# Altium PCB Audio_testboard.PcbDoc (part 4 of 6)
Units mm, origin at the board's own origin, x right, y up, seen from the top; angles counter-clockwise.
Board outline 220.73 x 144.32 mm, 4 copper layers (Top Layer, Mid-Layer 1, Mid-Layer 2, Bottom Layer), stack 1.894 mm thick; 462 components, 310 nets, 1757 pads, 740 vias.
Unrouted connection lines stored in the file: 5.
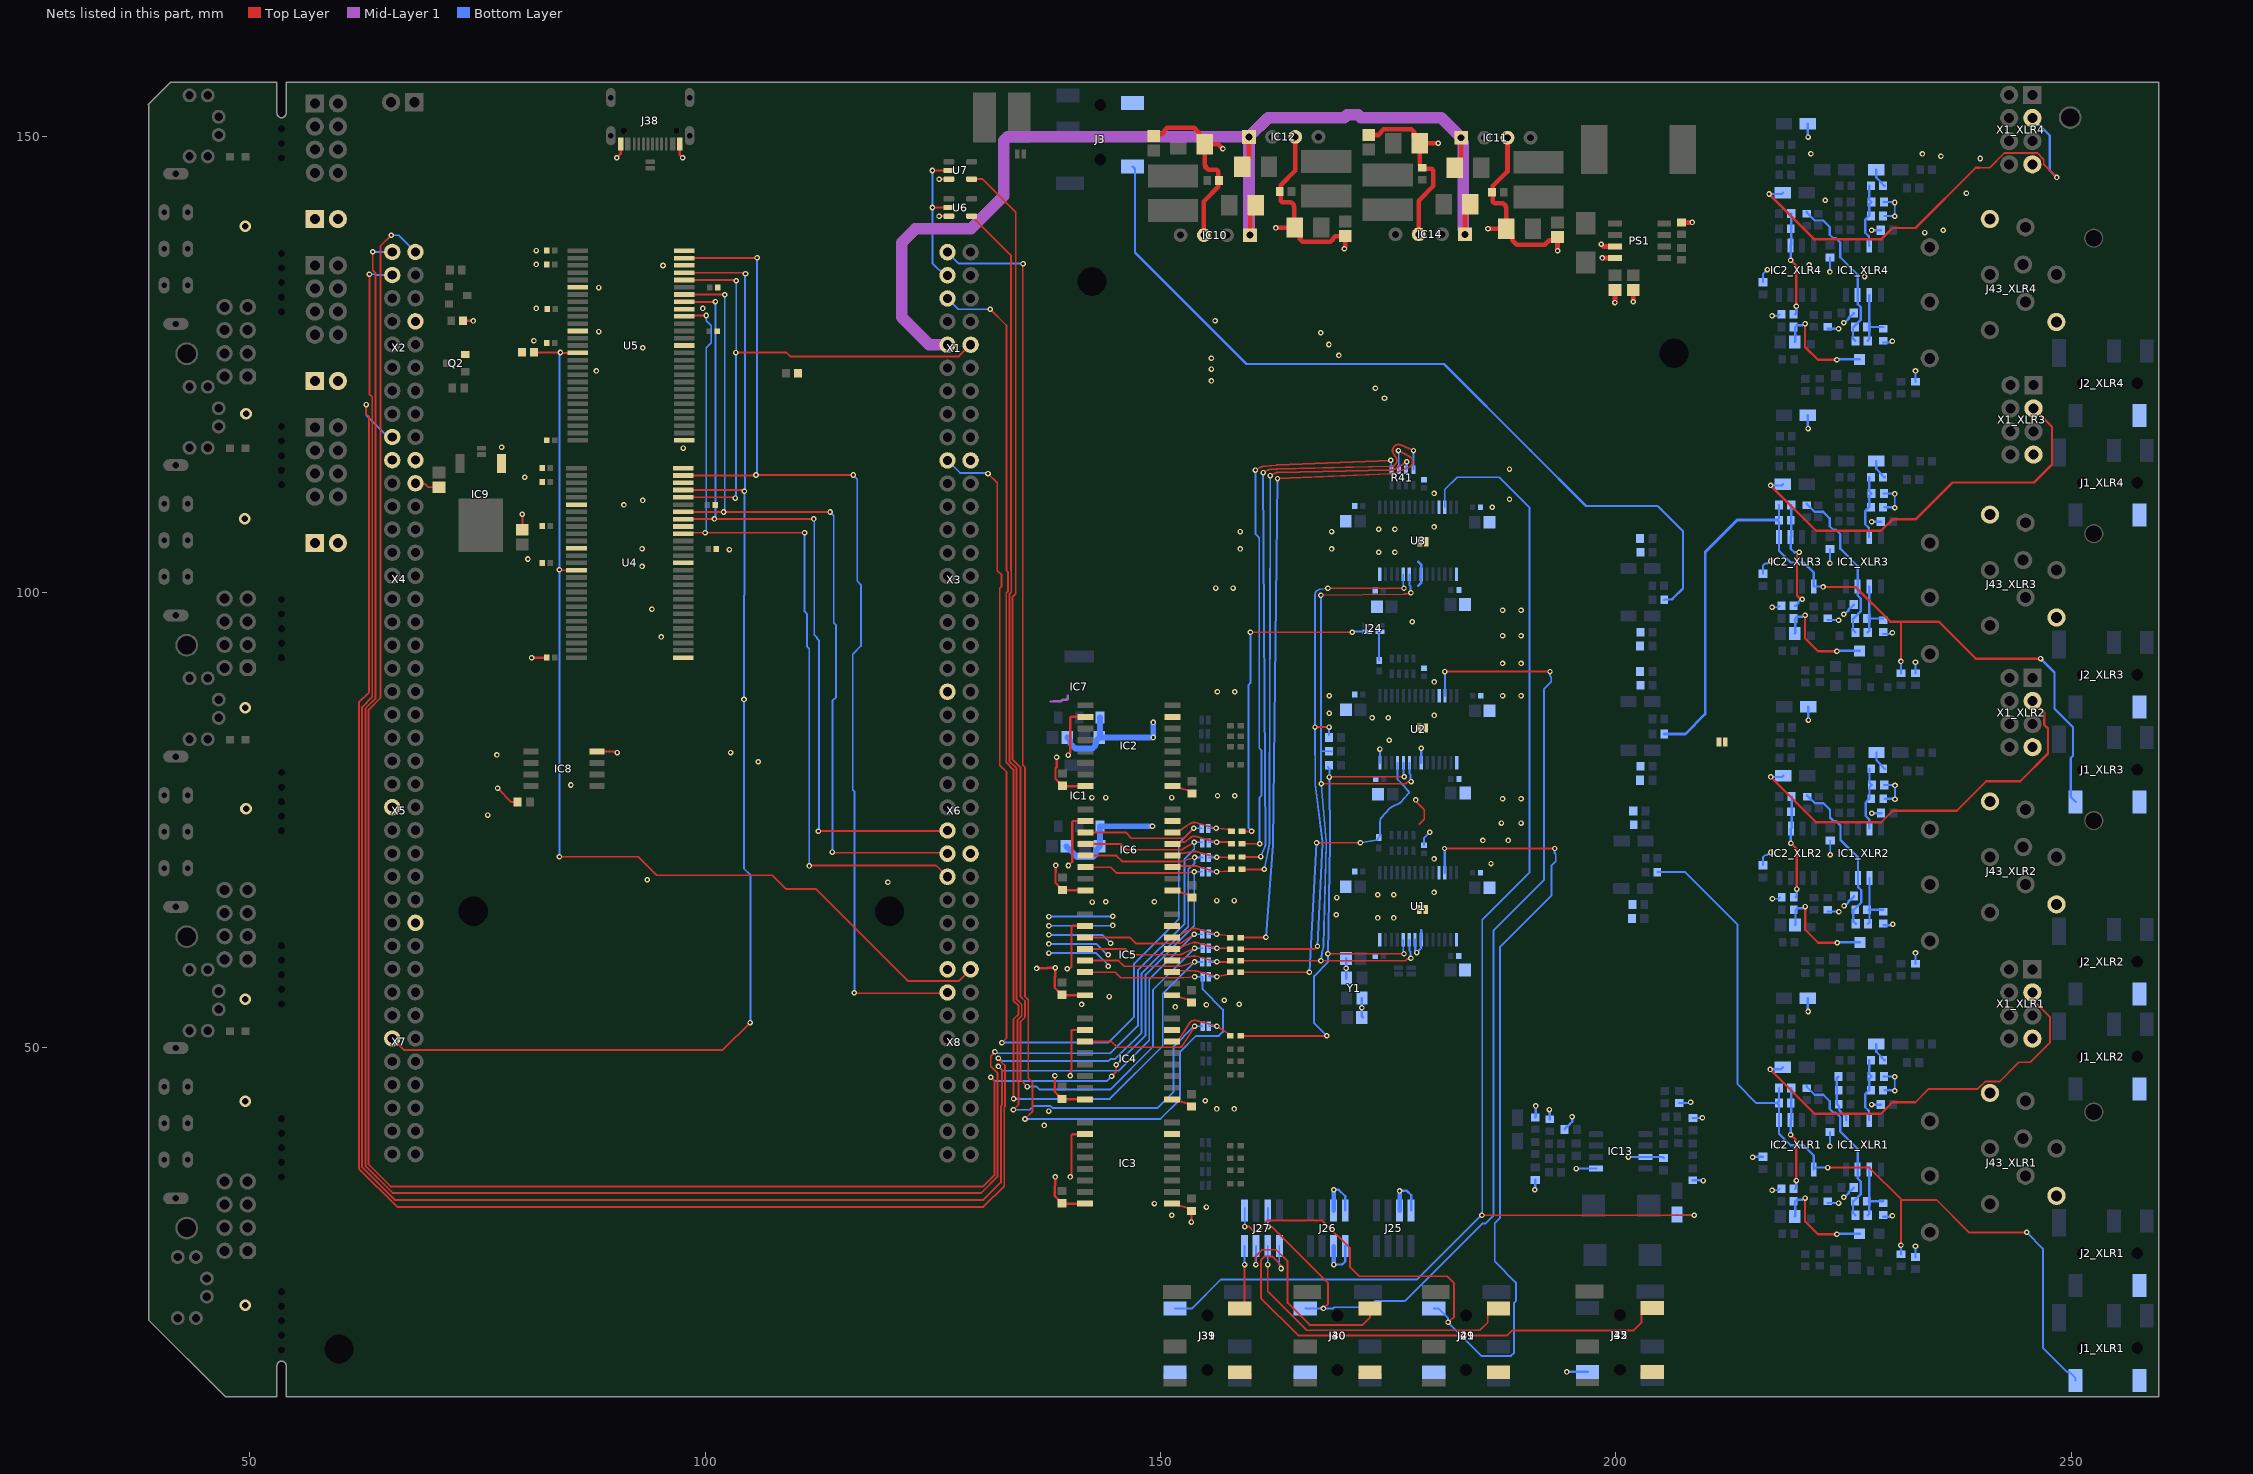
[diagram p5: the nets of this part, all layers, seen from the top]

## Via types
v1: diameter 0.61, hole 0.305, Top Layer to Bottom Layer, 321 vias
v2: diameter 0.6, hole 0.3, Top Layer to Bottom Layer, tented both sides, 219 vias
v3: diameter 0.61, hole 0.305, Top Layer to Bottom Layer, tented both sides, 190 vias
v4: diameter 1.27, hole 0.711, Top Layer to Bottom Layer, 8 vias
v5: diameter 0.6, hole 0.3, Top Layer to Bottom Layer, 2 vias

## Nets (pads, with @x,y where several pads share a name; then routed paths per layer and width w, separated by ;. In a path a pad name is that pad's centre, name@x,y a point inside that pad or via, vN(x,y) a via of type N, cw(c..) or ccw(c..) an arc to the next point about the centre after c; other vN are vias at no path point) (continued)
D10: U4.45 U5.45 X6.15 | length 92.2
  Top Layer w0.203: U4.45@97.601,106.421 97.703,106.523 v3(100.006,106.523) v3(110.928,106.523) ; U5.45@97.822,130.385 v3(100.125,130.385) ; v3(111.436,69.947) 111.487,69.998 125.378,69.998 X6.15@126.62,68.756
  Bottom Layer w0.203: 100.125,106.845 100.125,126.844 100.684,127.403 100.684,129.236 100.125,129.795 v3(100.125,130.385) ; v3(110.928,106.523) 110.928,97.887 111.182,97.633 111.182,94.057 111.436,93.803 v3(111.436,69.947)
D11: U4.47 U5.47 X6.11 | length 90.2
  Top Layer w0.203: U4.47@97.601,108.021 100.996,108.021 v3(101.022,108.047) v3(111.944,108.047) ; U5.47@97.72,131.883 101.115,131.883 v3(101.141,131.909) ; v3(112.452,73.757) 112.491,73.796 126.581,73.796 X6.11@126.62,73.836
  Bottom Layer w0.203: v3@101.141,108.276 v3(101.141,131.909) ; v3(111.944,108.047) 111.995,107.996 111.995,95.332 112.273,95.054 112.273,94.963 112.503,94.733 112.503,73.808 v3(112.452,73.757)
D12: U4.48 U5.48 X6.13 | length 94.9
  Top Layer w0.203: U4.48@97.601,108.821 102.026,108.821 v3(102.038,108.809) v3(113.722,108.809) ; U5.48@97.72,132.683 102.145,132.683 v3(102.157,132.671) ; v3(113.976,71.471) 114.054,71.393 126.523,71.393 X6.13@126.62,71.296
  Bottom Layer w0.203: v3@102.038,108.919 102.157,109.038 v3(102.157,132.671) ; v3(113.722,108.809) 114.128,108.403 114.128,96.637 114.382,96.383 114.382,88.47 113.976,88.064 v3(113.976,71.471)
D13: U4.50 U5.50 X1.10 | length 61.9
  Top Layer w0.203: U4.50@97.601,110.421 103.22,110.421 v3(103.308,110.333) ; U5.50@97.72,134.283 103.339,134.283 v3(103.427,134.195) ; v3(103.381,126.314) 108.94,126.314 109.362,125.891 127.876,125.891 X1.10@129.16,127.176
  Bottom Layer w0.203: v3(103.308,110.333) 103.381,110.406 v3(103.381,126.314) 103.427,126.36 v3(103.427,134.195)
D14: U4.51 U5.51 X7.9 | length 137.2
  Top Layer w0.203: X7.9@65.66,51.001 66.916,49.745 101.948,49.745 104.94,52.737 v3(104.94,52.751) ; U4.51@97.601,111.221 104.198,111.221 v3(104.324,111.095) ; U5.51@97.72,135.083 104.317,135.083 v3(104.443,134.957)
  Bottom Layer w0.203: v3(104.443,134.957) 104.383,134.897 104.383,111.154 v3(104.324,111.095) 104.324,99.69 104.273,99.64 104.273,69.657 104.974,68.956 104.974,52.786 v3(104.94,52.751)
  other v3: 104.273,88.235
D15: U4.53 U5.53 X8.5 | length 118.7
  Top Layer w0.203: U4.53@97.601,112.821 105.542,112.821 v3(105.594,112.873) v3(116.262,112.873) ; U5.53@97.72,136.683 105.661,136.683 v3(105.713,136.735) ; v3(116.391,56.014) 116.428,55.977 126.541,55.977 X8.5@126.62,56.056
  Bottom Layer w0.203: v3@105.594,112.763 105.594,112.983 105.713,113.102 v3(105.713,136.735) ; v3(116.262,112.873) 116.709,112.426 116.709,101.235 117.116,100.828 117.116,94.098 116.211,93.194 116.211,78.309 116.414,78.106 116.414,56.038 v3(116.391,56.014)
Fout_1: J27.7 J39.2 | length 7.1
  Top Layer w0.203: J39.2@158.704,21.364 159.241,21.901 v1(159.241,26.179)
  Bottom Layer w0.203: v1(159.241,26.179) J27.7@159.241,28.212
Fout_2: J27.5 J40.2 | length 23.3
  Top Layer w0.203: v1(160.477,26.179) 160.401,26.255 160.401,27.051 161.163,27.813 162.687,27.813 163.957,26.543 163.957,21.971 166.37,19.558 172.212,19.558 173.004,20.35 J40.2@173.004,21.364
  Bottom Layer w0.203: v1(160.477,26.179) 160.477,28.178 J27.5@160.511,28.212
Fout_3: J27.3 J41.2 | length 33.6
  Top Layer w0.203: v1(161.781,26.179) 161.781,23.258 166.076,18.963 185.079,18.963 185.936,19.82 185.936,20.704 186.596,21.364 J41.2@187.104,21.364
  Bottom Layer w0.203: v1(161.781,26.179) J27.3@161.781,28.212
Fout_4: J27.1 J45.2 | length 55.9
  Top Layer w0.203: v1@163.161,25.828 163.171,25.838 163.171,26.157 163.051,26.277 163.051,26.315 162.289,27.077 161.443,27.077 161.036,26.67 161.036,22.479 165.116,18.399 188.071,18.399 188.595,18.923 201.93,18.923 202.832,19.825 202.832,20.74 203.492,21.4 J45.2@204,21.4
  Bottom Layer w0.203: J27.1@163.051,28.212 163.051,26.179 163.161,26.069
  other v1: 163.239,25.75
GND: C1.1 C2.1 C7.1 C8.1 C9.1 C10.1 C11.2 C12.2 C23.1 C25.1 C26.1 C31.2 C32.2 C33.2 C35.1 C37.1 C39.1 C42.1 C43.1 C44.2 C52.2 C54.1 C72.2 C73.1 C75.2 C76.1 C78.2 C79.1 C91.2 C92.1 C93.1 C94.1 IC1.1 IC2.9 IC2.15 IC3.9 IC3.15 IC4.9 IC4.15 IC5.9 IC5.15 IC6.9 IC6.15 IC7.1 IC10.3 IC11.3 IC12.3 IC14.3 J25.2 J25.4 J26.1 J26.2 J26.3 J26.4 J33.1 J34.1 J35.1 PS1.7 PS1.8 R46.1 R47.1 R60.1 R61.1 R62.1 U1.21 U1.22 U1.28 U2.21 U2.28 U3.21 U3.28 Y1.2 Y1.4 | length 167.8
  Top Layer w0.203: v2(178.037,77.197) 178.037,77.09 178.179,76.948 178.179,76.89 178.956,76.113 178.956,75.068 178.418,74.53
  Top Layer w0.254: IC3.9@151.265,32.874 152.013,32.676 153.026,32.395 C39.1@153.399,32.072 v2(153.399,30.842) ; IC4.9@151.265,44.324 152.013,44.126 153.026,43.845 C37.1@153.399,43.522 ; IC5.9@151.265,55.754 152.013,55.556 153.026,55.275 C35.1@153.399,54.952 ; IC6.9@151.336,67.272 152.084,67.074 153.097,66.793 C26.1@153.47,66.47 ; IC2.9@151.336,78.702 152.084,78.504 153.097,78.223 C54.1@153.47,77.9
  Top Layer w0.508: C73.1@149.26,150.1 149.454,150.294 150.173,150.294 150.43,150.551 150.43,150.647 150.762,150.98 153.702,150.98 154.234,150.447 154.234,149.846 C72.2@154.88,149.2 ; IC10.3@154.76,139.2 154.76,142.9 156.36,144.5 156.36,146.207 156.167,146.4 155.26,146.4 155.16,146.5 155.11,146.5 154.939,146.671 154.939,146.805 154.88,146.864 C72.2@154.88,149.2 ; v1(156.859,148.688) 156.347,149.2 C72.2@154.88,149.2 ; v1(162.66,140) C78.2@164.68,140 ; IC12.3@164.8,150 164.8,146.3 163.2,144.7 163.2,142.993 163.393,142.8 164.3,142.8 164.4,142.7 164.45,142.7 164.621,142.529 164.621,142.395 164.68,142.336 C78.2@164.68,140 ; v1(170.2,137.7) 170.2,137.727 170.3,137.827 C79.1@170.3,139.1 169.194,139.1 168.906,138.813 168.906,138.717 168.668,138.479 165.6,138.479 165.326,138.753 165.326,139.354 C78.2@164.68,140 ; C92.1@172.86,150.2 173.966,150.2 174.254,150.487 174.254,150.583 174.492,150.821 177.56,150.821 177.834,150.547 177.834,149.946 C91.2@178.48,149.3 ; IC14.3@178.36,139.3 178.36,143 179.96,144.6 179.96,146.307 179.767,146.5 178.86,146.5 R46.1@178.76,146.6 178.71,146.6 178.539,146.771 178.539,146.905 178.48,146.964 C91.2@178.48,149.3 ; v1(180.5,149.3) C91.2@178.48,149.3 ; v1(185.96,139.9) C75.2@187.98,139.9 ; IC11.3@188.1,149.9 188.1,146.2 186.5,144.6 186.5,142.893 186.693,142.7 187.6,142.7 187.7,142.6 187.75,142.6 187.921,142.429 187.921,142.295 187.98,142.236 C75.2@187.98,139.9 ; v1(193.6,137.5) C76.1@193.6,139 193.24,138.64 192.696,138.64 192.208,138.152 189.126,138.152 188.626,138.653 188.626,139.254 C75.2@187.98,139.9 ; v1(198.4,138.2) 198.409,138.2 198.644,137.965 PS1.7@199.888,137.965 ; v1(198.5,136.7) 198.505,136.695 PS1.8@199.888,136.695 ; v1(199.9,131.8) C93.1@199.9,133.2 ; v1(201.9,131.9) C94.1@201.9,133.2 ; R47.1@207.2,140.6 v1(208.4,140.6)
  Bottom Layer w0.254: v1(169.02,26.179) 169.943,26.179 170.29,26.526 J26.1@170.29,28.212 ; v1(169.02,34.4) 169.562,34.4 170.29,33.672 J26.2@170.29,32.112 ; C33.2@170.379,59.798 170.383,59.794 v5(170.383,58.714) 170.383,57.587 Y1.2@170.417,57.553 ; Y1.4@172.117,55.439 v5(172.117,54.386) 172.117,53.437 C32.2@172.233,53.321 ; U2.28@174.1,81.261 v2(174.1,82.785) ; v1(176.259,34.273) 177.055,34.273 177.529,33.799 J25.2@177.529,32.112 ; U1.22@177.961,61.83 177.961,60.704 178.139,60.527 v2(178.139,60.433) 178.606,60.9 178.606,61.815 U1.21@178.621,61.83 178.621,62.897 ; 178.284,103.377 178.618,103.043 178.618,101.965 U3.21@178.621,101.962 178.618,101.959 178.618,101.019 178.291,100.692 ; v2(178.635,82.875) 178.647,82.864 U2.21@178.647,81.261
  Bottom Layer w0.508: v1(169.02,26.179) J26.3@169.02,28.212 ; J26.4@169.02,32.112 v1(169.02,34.4) ; J25.4@176.259,32.112 v1(176.259,34.273)
  Bottom Layer w0.635: C2.1@139.683,72.117 139.683,72.067 140.016,71.734 140.066,71.734 140.544,71.256 140.544,71.201 140.849,70.896 142.581,70.896 142.886,71.201 142.886,71.638 143.315,72.067 C1.1@143.315,72.117 143.37,72.172 IC1.1@143.37,74.307 v1(149.112,74.307) ; C23.1@139.759,84.055 140.092,83.722 140.092,83.393 140.65,82.834 142.543,82.834 142.848,83.139 142.848,83.301 142.944,83.397 142.944,83.722 C25.1@143.277,84.055 ; IC7.1@143.37,86.245 143.37,84.148 C25.1@143.277,84.055 ; v1(149.208,85.708) v1(149.208,84.055) C25.1@143.277,84.055
  other v2: 151.24,31.604 155.05,32.493 149.335,32.874 156.193,43.268 158.098,43.268 154.923,44.177 151.621,54.464 155.05,54.718 158.66,54.769 157.001,55.209 173.846,64.243 175.624,64.243 169.29,64.589 142.511,65.986 144.001,66.021 149.335,66.021 156.193,66.148 158.098,66.148 169.362,66.475 173.846,66.783 175.624,66.783 142.477,77.451 144.001,77.451 151.24,77.451 156.264,77.666 158.169,77.666 175.108,83.759 173.236,86.214 175.014,86.214 168.532,86.722 168.532,88.627 156.253,89.085 158.158,89.085 177.656,96.755 156.066,100.458 157.971,100.458 173.965,104.375 175.743,104.375 158.753,104.756 168.786,104.756 158.753,106.661 168.786,106.661 173.965,106.915 175.743,106.915
GND_A: C3.1 C4.1 C5.1 C5_XLR1.1 C5_XLR2.1 C5_XLR3.1 C5_XLR4.1 C6.1 C8_XLR1.2 C8_XLR2.2 C8_XLR3.2 C8_XLR4.2 C9_XLR1.2 C9_XLR2.2 C9_XLR3.2 C9_XLR4.2 C10_XLR1.1 C10_XLR2.1 C10_XLR3.1 C10_XLR4.1 C11_XLR1.1 C11_XLR2.1 C11_XLR3.1 C11_XLR4.1 C12_XLR1.2 C12_XLR2.2 C12_XLR3.2 C12_XLR4.2 C13_XLR1.1 C13_XLR2.1 C13_XLR3.1 C13_XLR4.1 C15.1 C16.1 C17.1 C18.1 C21.1 C22.1 C27.2 C28.2 C29.2 C30.2 C40.1 C41.1 C46.1 C47.1 C49.1 C50.2 C51.2 C84.1 C88.1 C89.2 C90.1 D2_XLR1.2 D2_XLR2.2 D2_XLR3.2 D2_XLR4.2 IC13.3 IC13.5 J1_XLR1.3 J1_XLR2.3 J1_XLR3.3 J1_XLR4.3 J2_XLR1.3 J2_XLR2.3 J2_XLR3.3 J2_XLR4.3 J3.3 J29.3 J30.3 J31.3 J32.3 J33.2 J34.2 J35.2 J36.1 J36.2 J39.3 J40.3 J41.3 J43_XLR1.1 J43_XLR1.4 J43_XLR2.1 J43_XLR2.4 J43_XLR3.1 J43_XLR3.4 J43_XLR4.1 J43_XLR4.4 J45.3 R3.1 R4.1 R7.1 R8.1 R9_XLR1.1 R9_XLR2.1 R9_XLR3.1 R9_XLR4.1 R10_XLR1.1 R10_XLR2.1 R10_XLR3.1 R10_XLR4.1 R11_XLR1.1 R11_XLR2.1 R11_XLR3.1 R11_XLR4.1 R19_XLR1.2 R19_XLR2.2 R19_XLR3.2 R19_XLR4.2 R20_XLR1.1 R20_XLR2.1 R20_XLR3.1 R20_XLR4.1 R38.1 R40.1 R52.2 R53.1 R58.2 R59.1 R66_XLR1.1 R66_XLR2.1 R66_XLR3.1 R66_XLR4.1 U1.11 U1.15 U2.11 U2.15 U3.11 U3.15 X1_XLR1.7 X1_XLR2.7 X1_XLR3.7 X1_XLR4.7 | length 129.3
  Top Layer w0.254: v1(220.774,33.48) 220.774,30.939 222.193,29.52 v1(224.266,29.52) ; v1(220.774,97.48) 220.774,94.939 222.193,93.52 v1(224.266,93.52) ; v1(220.774,129.48) 220.774,126.939 222.193,125.52 v1(224.266,125.52) ; v1(220.806,65.48) 220.806,62.939 222.225,61.52 v1(224.298,61.52)
  Bottom Layer w0.203: C15.1@178.926,72.235 178.926,73.006 v2(179.561,73.641) ; C9_XLR3.2@216.138,102.027 216.138,102.918 216.356,103.136 216.601,103.136 216.891,103.426 v1(217.001,103.426) ; C9_XLR4.2@216.138,134.027 216.138,134.918 v1(216.646,135.426) ; C9_XLR2.2@216.17,70.027 216.17,70.918 216.372,71.12 216.585,71.12 216.891,71.426 v1(217.001,71.426) ; v1(217.154,34.346) 217.822,34.346 R10_XLR1.1@217.994,34.518 ; v1(217.154,98.346) 217.822,98.346 R10_XLR3.1@217.994,98.518 ; v1(217.154,130.346) 217.822,130.346 R10_XLR4.1@217.994,130.518 ; v1(217.186,66.346) 217.854,66.346 R10_XLR2.1@218.026,66.518 ; v1(223.504,39.172) C11_XLR1.1@223.504,40.741 ; v1(223.504,103.172) C11_XLR3.1@223.504,104.741 ; v1(223.504,135.172) C11_XLR4.1@223.504,136.741 ; v1(223.536,71.172) C11_XLR2.1@223.536,72.741 ; v1(230.616,45.268) v1(230.616,46.792) ; v1(230.616,109.268) v1(230.616,110.792) ; v1(230.616,141.268) v1(230.616,142.792) ; v1(230.648,77.268) v1(230.648,78.792)
  Bottom Layer w0.254: v1(191.1,34.4) 191.15,34.45 C88.1@191.15,35.477 ; R58.2@191.15,42.327 191.2,42.377 v1(191.2,43.6) ; v1(192.7,43.2) 192.75,43.15 R59.1@192.75,42.127 ; C89.2@194.375,41.027 194.375,41.077 194.698,41.4 194.748,41.4 195.2,41.852 v1(195.2,42.4) ; v1(194.6,14.4) J32.3@196.9,14.4 ; v1(195.655,36.722) IC13.5@197.838,36.722 ; v1(201.385,37.992) IC13.3@203.262,37.992 205.135,37.992 C90.1@205.25,37.877 ; R53.1@206.95,43.927 208.127,43.927 v1(208.2,44) ; R52.2@208.45,35.427 209.573,35.427 v1(209.6,35.4) ; C84.1@208.45,42.277 209.477,42.277 v1(209.5,42.3) ; v1(215.011,37.973) 215.065,38.027 C9_XLR1.2@216.138,38.027 ; C13_XLR1.1@219.643,31.47 219.694,31.521 219.694,33.121 219.875,33.302 220.499,33.302 220.678,33.48 v1(220.774,33.48) ; C13_XLR3.1@219.643,95.47 219.694,95.521 219.694,97.121 219.875,97.302 220.499,97.302 220.678,97.48 v1(220.774,97.48) ; C13_XLR4.1@219.643,127.47 219.694,127.521 219.694,129.121 219.875,129.302 220.499,129.302 220.678,129.48 v1(220.774,129.48) ; C13_XLR2.1@219.675,63.47 219.726,63.521 219.726,65.121 219.907,65.302 220.531,65.302 220.71,65.48 v1(220.806,65.48) ; C12_XLR1.2@221.082,55.428 221.082,53.994 v1(221.11,53.966) ; C12_XLR3.2@221.082,119.428 221.082,117.994 v1(221.11,117.966) ; C12_XLR4.2@221.082,151.428 221.082,149.994 v1(221.11,149.966) ; C12_XLR2.2@221.114,87.428 221.114,85.994 v1(221.142,85.966) ; R19_XLR1.2@223.25,32.945 224.437,32.945 v1(224.457,32.926) ; R19_XLR3.2@223.25,96.945 224.437,96.945 v1(224.457,96.926) ; R19_XLR4.2@223.25,128.945 224.437,128.945 v1(224.457,128.926) ; R19_XLR2.2@223.282,64.945 224.469,64.945 v1(224.489,64.926) ; v1(224.266,29.52) 224.311,29.565 D2_XLR1.2@226.772,29.565 ; v1(224.266,93.52) 224.311,93.565 D2_XLR3.2@226.772,93.565 ; v1(224.266,125.52) 224.311,125.565 D2_XLR4.2@226.772,125.565 ; v1(224.298,61.52) 224.343,61.565 D2_XLR2.2@226.804,61.565 ; v1(225.028,33.584) 225.096,33.652 225.198,33.652 225.554,34.008 225.554,34.11 225.716,34.272 225.801,34.272 226.124,34.595 C8_XLR1.2@226.124,34.645 ; v1(225.028,97.584) 225.096,97.652 225.198,97.652 225.554,98.008 225.554,98.11 225.716,98.272 225.801,98.272 226.124,98.595 C8_XLR3.2@226.124,98.645 ; v1(225.028,129.584) 225.096,129.652 225.198,129.652 225.554,130.008 225.554,130.11 225.716,130.272 225.801,130.272 226.124,130.595 C8_XLR4.2@226.124,130.645 ; v1(225.06,65.584) 225.128,65.652 225.23,65.652 225.586,66.008 225.586,66.11 225.748,66.272 225.833,66.272 226.156,66.595 C8_XLR2.2@226.156,66.645 ; v1(228.076,43.744) C10_XLR1.1@229.092,43.744 ; v1(228.076,107.744) C10_XLR3.1@229.092,107.744 ; v1(228.076,139.744) C10_XLR4.1@229.092,139.744 ; v1(228.108,75.744) C10_XLR2.1@229.124,75.744 ; R9_XLR1.1@229.346,31.421 230.135,31.421 230.266,31.552 v1(230.362,31.552) ; R9_XLR3.1@229.346,95.421 230.135,95.421 230.266,95.552 v1(230.362,95.552) ; R9_XLR4.1@229.346,127.421 230.135,127.421 230.266,127.552 v1(230.362,127.552) ; R9_XLR2.1@229.378,63.421 230.167,63.421 230.298,63.552 v1(230.394,63.552) ; C5_XLR1.1@229.426,46.837 230.571,46.837 v1(230.616,46.792) ; C5_XLR3.1@229.426,110.837 230.571,110.837 v1(230.616,110.792) ; C5_XLR4.1@229.426,142.837 230.571,142.837 v1(230.616,142.792) ; C5_XLR2.1@229.458,78.837 230.603,78.837 v1(230.648,78.792) ; R11_XLR1.1@229.522,45.313 230.571,45.313 v1(230.616,45.268) ; R11_XLR3.1@229.522,109.313 230.571,109.313 v1(230.616,109.268) ; R11_XLR4.1@229.522,141.313 230.571,141.313 v1(230.616,141.268) ; R11_XLR2.1@229.554,77.313 230.603,77.313 v1(230.648,77.268) ; R66_XLR1.1@232.9,27 v1(232.9,28.2) ; R66_XLR2.1@232.9,59.2 v1(232.9,60.4) ; R66_XLR3.1@232.9,91.1 v1(232.9,92.3) ; R66_XLR4.1@232.9,123.1 v1(232.9,124.3)
  other v1: 174.6,121.3 173.6,122.4 155.6,123.2 155.6,124.5 155.6,125.7 169.6,126 168.5,127.2 167.6,128.5 156,129.8 227.314,134.664 221.218,135.934 233.918,139.49 235.95,139.744 222.996,143.046 238.49,143.808 240.014,147.618 235.696,147.872 233.664,148.126 221.412,148.153
  other v2: 180.044,67.037 186.292,70.212 180.044,70.72 185.403,72.752 188.197,72.752 187.435,74.657 189.59,74.657 187.562,77.324 189.59,77.324 180.069,86.468 187.562,88.627 189.59,88.627 180.069,90.151 187.562,92.183 189.59,92.183 187.562,95.231 189.59,95.231 187.562,98.025 189.59,98.025 180.044,107.169 186.419,109.328 188.324,110.217 180.044,110.852 188.324,113.519
  other v4: 49.5,21.704 49.5,44.104 49.5,55.304 49.6,76.204 49.5,87.304 49.473,108.077 49.6,119.604 49.5,140.204
GND_MCU: C24.1 C34.1 C36.1 C38.1 C53.1 C55.2 C56.2 C57.2 C58.2 C59.2 C60.2 C61.2 C62.2 C63.2 C64.2 C65.2 C66.2 C67.2 C68.2 C69.1 C70.1 C71.1 C74.2 C77.2 C80.2 C95.2 IC2.2 IC2.8 IC3.2 IC3.8 IC4.2 IC4.8 IC5.2 IC5.8 IC6.2 IC6.8 IC8.4 IC9.1 IC10.1 IC11.1 IC12.1 IC14.1 J38.A1B12 J38.B1A12 Q2.2 R43.1 R44.1 R109.2 U4.6 U4.12 U4.28 U4.41 U4.46 U4.52 U4.54 U5.6 U5.12 U5.28 U5.41 U5.46 U5.52 U5.54 U6.3 U7.3 X1.9 X1.20 X2.8 X2.19 X2.20 X3.19 X4.2 X5.9 X5.20 X6.14 X8.3 X9.1 X9.2 X11.1 X11.2 X12.1 X12.2 | length 240.3
  Top Layer w0.203: X4.2@68.2,111.961 68.244,111.917 69.242,111.917 69.632,111.527 C71.1@70.796,111.527 ; v1(77.216,78.486) 78.74,76.962 C69.1@79.422,76.962 ; C70.1@79.94,106.853 v3(79.94,108.555) ; v1(125.699,141.29) U6.3@126.761,141.29 ; v1(125.699,145.354) U7.3@126.761,145.354
  Top Layer w0.254: R109.2@73.436,129.794 v1(74.549,129.794) ; v3(80.956,92.807) 80.97,92.821 C61.2@82.63,92.821 ; IC8.4@88.112,82.52 90.131,82.52 90.258,82.393 v3(90.354,82.393) ; v1(90.297,147.701) 90.73,148.134 J38.B1A12@90.73,149.21 ; J38.A1B12@97.23,149.21 97.23,148.007 v1(97.536,147.701) ; v1(136.4,58.7) 137.563,58.7 137.639,58.776 v1(138.451,58.776) 138.451,57.772 138.396,57.717 138.396,56.58 138.802,56.174 138.802,56.124 139.125,55.801 C34.1@139.175,55.801 139.222,55.754 IC5.8@141.715,55.754 ; v1(138.416,46.904) 138.429,46.891 138.429,46.32 138.396,46.287 138.396,45.15 138.802,44.744 138.802,44.694 139.125,44.371 C36.1@139.175,44.371 139.222,44.324 IC4.8@141.715,44.324 ; v1(138.46,35.799) 138.46,34.901 138.396,34.837 138.396,33.7 138.802,33.294 138.802,33.244 139.125,32.921 C38.1@139.175,32.921 139.222,32.874 IC3.8@141.715,32.874 ; v1(138.5,70) 138.5,69.268 138.467,69.235 138.467,68.098 138.873,67.692 138.873,67.642 139.196,67.319 C24.1@139.246,67.319 ; v1(138.598,81.876) 138.598,80.796 138.467,80.665 138.467,79.528 138.873,79.122 138.873,79.072 139.196,78.749 C53.1@139.246,78.749 139.293,78.702 IC2.8@141.786,78.702 ; C24.1@139.293,67.272 IC6.8@141.786,67.272 ; v1(139.774,58.666) 139.842,58.734 140.081,58.734 140.237,58.89 140.237,63.255 140.356,63.374 IC5.2@141.715,63.374 ; v1(139.871,82.114) 139.871,82.182 140.1,82.411 140.1,86.203 140.219,86.322 IC2.2@141.786,86.322 ; v1(139.895,69.995) 140.308,70.408 140.308,74.773 140.427,74.892 IC6.2@141.786,74.892 ; v1(140.094,35.799) 140.094,35.952 140.237,36.096 140.237,40.375 140.356,40.494 IC3.2@141.715,40.494 ; v1(140.094,46.904) 140.162,46.972 140.162,47.305 140.237,47.381 140.237,51.825 140.356,51.944 IC4.2@141.715,51.944
  Top Layer w0.508: C80.2@159,146.7 159,146.915 159.72,147.635 IC12.1@159.72,150 ; IC10.1@159.84,139.2 159.84,141.565 160.56,142.285 C74.2@160.56,142.5 ; C77.2@182.3,146.6 182.3,146.815 183.02,147.535 IC11.1@183.02,149.9 ; IC14.1@183.44,139.3 183.44,141.665 184.16,142.385 C95.2@184.16,142.6
  Mid-Layer 1 w0.254: 137.922,88.011 138.3,88.011 138.321,88.032 139.106,88.032 139.258,88.184 139.708,88.184 139.827,88.303 139.827,88.646
  Mid-Layer 1 w1.27: X1.9@126.62,127.176 124.624,127.176 121.6,130.2 121.6,138.4 123.1,139.9 129.2,139.9 132.8,143.5 132.8,149.583 133.217,150 IC12.1@159.72,150 ; IC10.1@159.84,139.2 159.72,139.32 IC12.1@159.72,150 ; IC14.1@183.44,139.3 183.313,139.427 183.313,139.796 183.265,139.844 183.265,149.356 183.147,149.474 183.147,149.773 180.82,152.1 172.019,152.1 171.689,152.43 170.511,152.43 170.181,152.1 161.82,152.1 IC12.1@159.72,150
  Bottom Layer w0.203: v2(137.757,60.386) 137.76,60.383 142.955,60.383 144.156,59.182 144.156,59.044 v1(144.272,58.928) ; v2@137.76,61.383 142.955,61.383 144.14,60.198 v1(144.272,60.198) ; v2@137.76,62.383 143.611,62.383 v1(144.526,61.468) ; v2@137.76,63.383 v2@144.733,63.383 ; v2@137.76,64.383 v2@144.733,64.383
  other v1: 91.094,109.587
  other v2: 137.239,41.459 137.729,43.029 141.334,54.737 144.382,55.607 137.757,61.386 137.757,62.386 137.757,63.386 144.763,63.413 137.757,64.386 144.763,64.413
  other v3: 120.072,68.169 93.656,68.423 76.13,75.535 85.274,78.837 105.848,81.377 77.146,82.139 102.8,82.393 95.18,95.093 94.164,98.141 93.084,102.83 80.55,103.646 102.677,104.676 93.084,104.785 93.148,110.079 80.194,112.619 97.608,115.826 77.654,115.921 88.068,124.303 93.148,126.843 81.21,127.605 88.322,128.621 81.464,131.161 99.752,131.161 88.322,133.447 95.38,135.871 81.464,135.987 81.464,137.511
I2C1_SCL: U6.2 U7.2 X1.3 | length 16
  Top Layer w0.203: v1(124.968,142.24) U6.2@126.761,142.24 ; v1(124.968,146.304) U7.2@126.761,146.304
  Bottom Layer w0.203: v1(124.968,146.304) v1(124.968,142.24) 124.968,136.144 126.316,134.796 X1.3@126.62,134.796
I2C1_SCL1: IC4.3 J18.1 U6.4 | length 142.4
  Top Layer w0.203: U6.4@129.271,141.29 129.49,141.29 129.68,141.1 129.68,140.881 133.604,136.957 133.604,102.365 133.62,102.349 133.62,99.983 133.417,99.78 133.417,81.465 134.214,80.668 134.214,55.294 134.772,54.735 134.772,53.498 134.29,53.015 134.29,46.309 134.432,46.167 134.432,43.754 v1(133.858,43.18) ; IC4.3@141.715,50.674 144.616,50.674 145.256,50.034 152.172,50.034 ccw(c152.172,50.237) 152.314,50.092 152.356,50.134 ccw(c152.14,50.349) 152.398,50.187 v2(153.748,52.345)
  Bottom Layer w0.203: v1(133.858,43.18) 135.636,43.18 136.039,43.583 137.958,43.583 138.158,43.383 142.955,43.383 149.684,43.383 151.44,45.139 151.44,50.116 153.669,52.345 v2(153.748,52.345) ; v2@153.753,52.35 J18.1@154.623,52.35
I2C1_SCL1_: R18.2 R25.2 U1.24 U2.24 | length 60.4
  Top Layer w0.203: R25.2@158.931,51.487 158.881,51.487 158.733,51.339 158.733,51.289 v2(168.258,51.289) ; v2(168.385,60.306) v2(176.742,60.306) ; v2(168.546,79.705) 168.578,79.737 v2(176.767,79.737)
  Bottom Layer w0.203: v2(168.258,51.289) 166.861,52.686 166.861,57.855 168.385,59.379 v2(168.385,60.306) cw(c168.588,60.306) 168.385,60.31 168.606,72.454 ccw(c167.138,72.481) 168.606,72.493 v2(168.546,79.705) 168.546,80.634 R18.2@168.35,80.845 ; U1.24@176.665,61.83 176.665,60.49 176.742,60.413 v2(176.742,60.306) ; U2.24@176.691,81.261 176.691,79.921 176.767,79.844 v2(176.767,79.737)
I2C1_SCL1_i: IC4.14 J18.2 R25.1 | length 8.9
  Top Layer w0.203: IC4.14@151.265,50.674 152.038,50.897 152.396,51.454 153.196,52.699 cw(c153.748,52.345) 153.915,52.979 156.106,52.408 cw(c156.055,52.211) v2(156.198,52.355) ; R25.1@157.733,51.289 157.585,51.487 156.235,52.326 cw(c156.342,52.498) v2@156.199,52.354 ; v2(156.198,52.355) v2@156.199,52.354
  Bottom Layer w0.203: J18.2@155.323,52.35 156.193,52.35 v2(156.198,52.355)
I2C1_SCL2: IC5.4 J17.1 U7.4 | length 145.5
  Top Layer w0.203: U7.4@129.271,145.354 130.49,145.354 134.112,141.732 134.112,99.822 133.772,99.482 133.772,81.612 134.62,80.765 134.62,55.626 135.128,55.118 135.128,53.35 134.645,52.868 134.645,46.457 v1(135.382,45.72) ; IC5.4@141.715,60.834 146.14,60.834 146.77,60.204 152.182,60.204 ccw(c152.182,60.407) 152.266,60.223 v2(153.748,60.905)
  Bottom Layer w0.203: v1(135.382,45.72) 136.398,45.72 136.735,45.383 144.476,45.383 149.183,50.089 149.183,56.34 v2(153.748,60.905) ; v2@153.753,60.91 J17.1@154.623,60.91
I2C1_SCL2_: R30.2 R42.2 U3.24 | length 61.2
  Top Layer w0.203: R30.2@158.733,60.814 159.876,60.814 166.874,60.814 167.189,61.13 v2(167.242,61.13) ; v2(166.967,85.198) v2(168.512,85.198) ; v2(168.385,100.438) v2(176.742,100.438)
  Bottom Layer w0.203: v2(167.242,61.13) 167.793,72.449 ccw(c167.138,72.481) 167.788,72.562 166.998,78.894 cw(c167.648,78.975) 166.993,78.972 166.967,85.197 166.967,99.676 cw(c167.623,99.676) 167.537,100.326 v2(168.385,100.438) ; R42.2@168.512,84.294 v2(168.512,85.198) ; v2@176.665,100.622 U3.24@176.665,101.962
I2C1_SCL2_i: IC5.13 J17.2 R30.1 | length 7.6
  Top Layer w0.203: IC5.13@151.265,60.834 152.038,61.057 152.172,61.057 ccw(c152.172,61.667) 152.385,61.096 153.519,61.519 cw(c153.748,60.905) 153.923,61.537 156.144,60.922 ccw(c156.198,61.118) v2(156.198,60.915) 157.585,60.915 R30.1@157.733,60.814
  Bottom Layer w0.203: J17.2@155.323,60.91 156.193,60.91 v2(156.198,60.915)
I2C1_SDA: IC5.5 J19.1 X1.5 | length 136.3
  Top Layer w0.203: v1(131.318,131.064) 133.096,129.286 133.096,102.37 133.264,102.201 133.264,100.13 133.061,99.927 133.061,81.317 133.858,80.521 133.858,55.146 134.417,54.587 134.417,53.645 133.858,53.086 133.858,44.398 v1(133.873,44.383) ; IC5.5@141.715,59.564 145.378,59.564 146.008,58.934 152.182,58.934 ccw(c152.182,59.137) 152.241,58.943 v2(153.748,59.406)
  Bottom Layer w0.203: X1.5@126.62,132.256 127.812,131.064 v1(131.318,131.064) ; v1(133.873,44.383) 133.889,44.367 144.443,44.367 150.256,50.18 150.256,55.914 v2(153.748,59.406) ; v2@153.753,59.411 J19.1@154.623,59.411
I2C1_SDA_: R17.2 R31.2 U1.23 U2.23 U3.23 | length 86.5
  Top Layer w0.203: R31.2@158.733,59.544 176.907,59.544 177.108,59.745 177.451,59.745 v2(177.504,59.798) ; v2(167.623,99.676) 176.749,99.782 ccw(c176.742,100.438) 176.878,99.797 v2(177.504,99.93) v2@177.451,99.877 ; v2(167.648,78.975) 176.932,78.975 177.133,79.176 177.476,79.176 v2(177.512,79.212)
  Bottom Layer w0.203: v2(167.623,59.544) 167.735,60.392 cw(c168.385,60.306) 167.75,60.468 167.877,60.968 ccw(c167.242,61.13) 167.897,61.112 168.199,72.452 ccw(c167.138,72.481) 168.196,72.57 167.658,78.927 ccw(c167.456,78.91) v2(167.648,78.975) 167.634,79.018 cw(c167.826,79.083) 167.623,79.082 167.623,82.658 ; v2(167.623,99.676) 167.623,82.658 ; R17.2@168.766,82.531 168.189,82.539 167.826,82.539 cw(c167.826,82.742) 167.683,82.598 167.623,82.658 ; U1.23@177.326,61.83 177.326,60.649 177.47,60.504 177.47,59.831 v2(177.504,59.798) ; U3.23@177.326,101.962 177.326,100.781 177.47,100.636 177.47,99.963 v2(177.504,99.93) ; U2.23@177.351,81.261 177.351,80.08 177.46,79.971 177.46,79.264 v2(177.512,79.212)
I2C1_SDA_i: IC5.12 J19.2 R31.1 | length 7.5
  Top Layer w0.203: IC5.12@151.265,59.564 152.038,59.787 152.221,59.799 ccw(c152.182,60.407) 152.291,59.808 153.631,60.051 cw(c153.748,59.406) 153.923,60.038 156.144,59.423 ccw(c156.198,59.619) v2(156.198,59.416) 157.585,59.416 R31.1@157.733,59.544
  Bottom Layer w0.203: J19.2@155.323,59.411 v2@156.193,59.411
I2S3_CK: IC6.4 J6.1 X2.1 | length 241.7
  Top Layer w0.203: v1(63.509,137.371) 63.509,135.338 63.821,135.025 63.821,88.353 62.704,87.235 62.704,37.019 65.687,34.036 130.302,34.036 132.123,35.857 132.123,47.201 131.367,47.957 131.367,49.071 131.823,49.527 v1(131.823,49.536) ; IC6.4@141.786,72.352 145.671,72.352 146.301,71.722 152.256,71.722 ccw(c152.256,71.925) 152.36,71.75 v2(153.715,72.55)
  Bottom Layer w0.203: v1(63.509,137.371) 63.519,137.361 X2.1@65.66,137.361 ; v1(131.823,49.536) 131.93,49.536 132.083,49.383 142.955,49.383 144.508,49.383 147.516,52.391 147.516,58.487 152.653,63.624 152.653,70.722 153.715,71.784 v2(153.715,72.55) ; v2@153.72,72.555 J6.1@154.59,72.555
I2S3_CK_: R34.2 R41.5 | length 59.5
  Top Layer w0.203: R34.2@158.862,72.385 160.878,72.385 v2(160.892,72.371) ; v2(160.427,113.407) 160.946,113.706 cw(c161.273,113.138) 161.205,113.79 162.7,113.945 cw(c162.851,112.484) 162.789,113.951 v2(175.299,114.479)
  Bottom Layer w0.203: v2(160.427,113.407) 160.427,106.398 160.783,106.041 cw(c160.639,105.898) 160.843,105.898 160.843,82.899 161.087,82.654 161.087,77.664 160.892,77.469 v2(160.892,72.371) ; v2(175.299,114.479) 175.335,114.443 175.335,113.476 R41.5@175.37,113.441
I2S3_CK_i: IC6.13 J6.2 R34.1 | length 7.8
  Top Layer w0.203: IC6.13@151.336,72.352 152.109,72.575 152.477,72.575 ccw(c152.477,73.185) 152.854,72.706 153.309,73.065 cw(c153.715,72.55) 153.89,73.182 156.111,72.567 ccw(c156.165,72.763) v2(156.165,72.56) 157.714,72.56 R34.1@157.862,72.385
  Bottom Layer w0.203: J6.2@155.29,72.555 156.16,72.555 v2(156.165,72.56)
I2S3_MCK: IC6.3 J8.1 X1.19 | length 121.3
  Top Layer w0.203: v1(131.064,113.03) 132.08,112.014 132.08,102.38 132.553,101.907 132.553,100.651 132.35,100.448 132.35,81.023 133.096,80.277 133.096,51.054 v1(132.588,50.546) ; IC6.3@141.786,73.622 146.179,73.622 146.809,72.992 150.595,72.992 150.605,72.982 152.477,72.982 ccw(c152.477,73.185) 152.619,73.04 v2(153.653,74.074)
  Bottom Layer w0.203: X1.19@126.62,114.476 128.006,113.09 131.004,113.09 v1(131.064,113.03) ; v1(132.588,50.546) 144.272,50.546 147.11,53.384 147.11,59.224 152.002,64.116 152.002,72.423 v2(153.653,74.074) ; v2@153.658,74.079 J8.1@154.528,74.079
I2S3_MCK_: J24.2 R33.2 | length 36.1
  Top Layer w0.203: R33.2@158.862,73.74 159.975,73.74 v2(160.003,73.768) ; v2(159.876,95.612) v2(171.052,95.612)
  Bottom Layer w0.203: v2(159.876,95.612) 159.876,90.04 159.683,89.847 159.683,74.088 v2(160.003,73.768) ; v2(171.052,95.612) 171.114,95.674 J24.2@172.7,95.674
I2S3_MCK_i: IC6.14 J8.2 R33.1 | length 7.9
  Top Layer w0.203: IC6.14@151.336,73.622 152.109,73.845 153.293,74.622 cw(c153.653,74.074) 153.826,74.706 v2(156.103,74.084) ccw(c156.157,74.28) 156.139,74.078 157.714,73.938 R33.1@157.862,73.74
  Bottom Layer w0.203: J8.2@155.228,74.079 v2@156.098,74.079
I2S3_SDI: IC6.6 J7.1 X2.2 | length 240.5
  Top Layer w0.203: v1(65.535,139.191) 64.364,138.02 64.364,88.392 63.06,87.088 63.06,37.166 65.464,34.762 130.52,34.762 131.768,36.01 131.768,46.346 131.377,46.736 v1(131.377,46.746) ; IC6.6@141.786,69.812 144.528,69.812 145.158,69.182 152.253,69.182 ccw(c152.253,69.385) 152.268,69.183 v2(153.715,69.299) ; v2(144.636,46.844) 145.144,47.352 v2(145.144,48.114)
  Bottom Layer w0.203: v1(65.535,139.191) 66.37,139.191 X2.2@68.2,137.361 ; v1(131.377,46.746) 131.778,46.345 144.137,46.345 v2(144.636,46.844) ; v2(145.144,48.114) 148.37,51.34 148.37,58.025 153.715,63.37 v2(153.715,69.299) ; v2@153.72,69.304 J7.1@154.59,69.304
I2S3_SDI_: R36.2 R41.7 | length 62
  Top Layer w0.203: R36.2@158.862,69.575 161.398,69.575 v2(161.4,69.577) ; v2(162.062,112.811) 162.547,113.065 cw(c162.851,112.484) 162.838,113.14 175.323,113.417 ccw(c175.299,114.479) 175.871,113.584 v2(177.033,114.327)
  Bottom Layer w0.203: v2(161.4,69.577) 161.661,70.841 161.932,72.157 ccw(c160.892,72.371) 161.954,72.368 v2(162.062,112.811) ; R41.7@176.97,113.441 177.002,113.473 177.002,114.295 v2(177.033,114.327)
I2S3_SDI_i: IC6.11 J7.2 R36.1 | length 7.6
  Top Layer w0.203: IC6.11@151.336,69.812 152.109,69.955 153.715,69.955 cw(c153.715,69.299) 153.89,69.931 156.106,69.316 ccw(c156.161,69.512) 156.161,69.309 v2(156.165,69.309) 157.714,69.376 R36.1@157.862,69.575
  Bottom Layer w0.203: J7.2@155.29,69.304 156.16,69.304 v2(156.165,69.309)
I2S3_SDO: IC5.3 J4.1 X2.3 | length 231.8
  Top Layer w0.203: v1(63.152,134.905) 63.152,121.76 63.466,121.446 63.466,88.5 62.348,87.383 62.348,36.872 65.946,33.274 130.556,33.274 132.486,35.204 132.486,43.581 132.588,43.683 132.588,47.552 132.206,47.934 v1(132.206,47.937) ; IC5.3@141.715,62.104 146.648,62.104 147.303,61.449 150.249,61.449 150.264,61.464 152.172,61.464 ccw(c152.172,61.667) 152.283,61.497 v2(153.715,62.441)
  Bottom Layer w0.203: v1(63.152,134.905) 63.874,134.905 63.957,134.821 X2.3@65.66,134.821 ; v1(132.206,47.937) 132.68,47.463 145.42,47.463 148.776,50.819 148.776,57.502 v2(153.715,62.441) ; v2@153.72,62.446 153.725,62.441 154.585,62.441 J4.1@154.59,62.446
I2S3_SDO_: R29.2 R41.6 | length 72.8
  Top Layer w0.203: R29.2@158.733,62.084 161.559,62.084 v2(161.58,62.105) ; v2(162.851,112.484) 175.361,113.012 ccw(c175.299,114.479) 175.869,113.125 177.288,113.722 ccw(c177.033,114.327) 177.342,114.905 v2(176.132,115.551)
  Bottom Layer w0.203: v2(161.58,62.105) 162.356,72.259 ccw(c160.892,72.371) 162.36,72.353 v2(162.851,112.484) ; v2(176.132,115.551) 176.17,115.513 R41.6@176.17,113.441
I2S3_SDO_i: IC5.14 J4.2 R29.1 | length 7.7
  Top Layer w0.203: IC5.14@151.265,62.104 152.038,62.327 153.419,63.026 cw(c153.715,62.441) 153.888,63.073 156.135,62.457 ccw(c156.189,62.653) v2(156.165,62.451) 157.585,62.282 R29.1@157.733,62.084
  Bottom Layer w0.203: J4.2@155.29,62.446 v2@156.16,62.446
I2S3_WS: IC6.5 J5.1 X2.17 | length 229.3
  Top Layer w0.203: v1(62.796,120.606) 62.796,119.566 63.11,119.252 63.11,89.018 61.993,87.901 61.993,36.724 66.205,32.512 130.556,32.512 132.842,34.798 132.842,43.434 132.944,43.536 132.944,47.989 132.457,48.476 132.457,48.535 132.207,48.785 v1(132.207,48.824) ; IC6.5@141.786,71.082 145.163,71.082 145.793,70.452 152.253,70.452 ccw(c152.253,70.655) 152.311,70.46 v2(153.745,70.887)
  Bottom Layer w0.203: v1(62.796,120.606) 62.808,120.594 62.808,120.05 62.807,120.049 62.807,119.443 64.797,117.454 64.815,117.454 64.966,117.303 65.398,117.303 X2.17@65.66,117.041 ; v1(132.207,48.824) 132.317,48.824 132.478,48.664 132.482,48.664 132.631,48.514 144.272,48.514 144.528,48.77 145.038,48.77 147.923,51.655 147.923,58.153 153.059,63.289 153.059,69.571 153.745,70.256 v2(153.745,70.887) ; v2@153.75,70.892 J5.1@154.62,70.892
I2S3_WS_: R35.2 R41.8 | length 65.7
  Top Layer w0.203: R35.2@158.862,70.93 160.975,70.93 v2(161.019,70.974) ; v2(161.273,113.138) 161.758,113.392 cw(c162.062,112.811) 161.994,113.463 162.742,113.541 cw(c162.851,112.484) 162.827,113.546 175.314,113.823 ccw(c175.299,114.479) 175.822,114.875 175.609,115.155 cw(c176.132,115.551) 176.392,116.153 v2(177.783,115.551)
  Bottom Layer w0.203: v2(161.019,70.974) 161.497,72.118 ccw(c160.892,72.371) 161.548,72.375 v2(161.273,113.138) ; R41.8@177.77,113.441 177.77,115.538 v2(177.783,115.551)
I2S3_WS_i: IC6.12 J5.2 R35.1 | length 7.5
  Top Layer w0.203: IC6.12@151.336,71.082 152.109,71.305 152.295,71.317 ccw(c152.256,71.925) 152.355,71.324 153.639,71.534 cw(c153.745,70.887) 153.92,71.519 156.141,70.904 ccw(c156.195,71.1) v2(156.195,70.897) 157.714,70.897 R35.1@157.862,70.93
  Bottom Layer w0.203: J5.2@155.32,70.892 156.19,70.892 v2(156.195,70.897)
I2S_CKIN: IC5.6 J16.1 X1.1 | length 152.4
  Top Layer w0.203: v1(134.912,136.064) 134.874,136.026 134.874,81.013 135.128,80.759 135.128,55.621 135.484,55.265 135.484,46.634 135.941,46.177 135.941,42.977 v1(135.128,42.164) ; IC5.6@141.715,58.294 141.735,58.274 145.017,58.274 145.627,57.664 152.518,57.664 ccw(c152.518,57.867) 152.536,57.665 v2(153.748,57.781)
  Bottom Layer w0.203: X1.1@126.62,137.336 127.878,136.078 v1@134.898,136.078 ; v1(135.128,42.164) 149.989,42.164 152.158,44.333 152.158,49.546 153.904,51.292 156.425,51.292 156.854,51.721 156.854,54.171 154.623,56.402 J16.1@154.623,57.786 v2@153.753,57.786
I2S_CKIN_: R15.2 R32.2 TP1.1 U2.25 | length 39
  Top Layer w0.203: R32.2@158.733,58.274 159.878,58.274 v2(166.353,58.274) ; v2(167.138,72.481) v2(171.956,72.486)
  Bottom Layer w0.203: v2(166.353,58.274) v2(167.138,72.481) ; v2(171.956,72.486) 173.775,72.8 R15.2@173.973,73.073 174.101,73.346 174.101,74.816 cw(c174.756,74.816) 174.268,75.253 175.178,76.271 cw(c175.667,75.834) 175.382,76.425 176.279,76.857 ccw(c176.147,77.132) 176.376,76.931 TP1.1@177.275,77.959 177.275,78.035 ccw(c177.072,78.035) 177.226,78.167 176.763,78.708 ccw(c176.609,78.576) 176.753,78.719 176.09,79.382 cw(c176.234,79.526) 176.03,79.526 U2.25@176.03,81.261
I2S_CKIN_i: IC5.11 J16.2 R32.1 | length 7.6
  Top Layer w0.203: IC5.11@151.265,58.294 152.038,58.437 153.748,58.437 cw(c153.748,57.781) 153.924,58.412 156.123,57.798 ccw(c156.177,57.994) 156.177,57.791 v2(156.198,57.791) 157.585,58.076 R32.1@157.733,58.274
  Bottom Layer w0.203: J16.2@155.323,57.786 156.193,57.786 v2(156.198,57.791)
I2S_CLKOUT2: J24.4 R16.2 | length 3.2
  Bottom Layer w0.203: R16.2@173.998,92.504 173.998,95.572 J24.4@174.1,95.674
LDQM: R43.2 U4.15 U5.15 X8.4 | length 113.5
  Top Layer w0.203: R43.2@81.21,126.335 84.109,126.335 v3(84.123,126.321) 84.161,126.283 U5.15@86.02,126.283 ; v3(84.004,70.963) 92.64,70.963 94.672,68.931 107.372,68.931 108.896,67.407 112.198,67.407 122.294,57.311 127.876,57.311 X8.4@129.16,58.596 ; v3(84.004,102.459) 84.042,102.421 U4.15@85.901,102.421
  Bottom Layer w0.203: v3(84.004,70.963) v3(84.004,102.459) 84.004,126.092 84.123,126.211 v3(84.123,126.321)
LIN1: C4_XLR1.1 IC2_XLR1.1 IC2_XLR1.5 J1_XLR1.2 R1.1 R6_XLR1.2 R65_XLR1.2 | length 96.5
  Top Layer w0.203: v1(223.266,36.83) 227.838,36.83 231.394,33.274 235.204,33.274 238.76,29.718 v1(245.11,29.718)
  Top Layer w0.254: v1(231.3,28.3) 231.3,33.18 231.394,33.274
  Bottom Layer w0.203: R1.1@204.552,69.264 207.596,69.264 213.36,63.5 213.36,45.974 215.418,43.916 R6_XLR1.2@217.701,43.916 ; IC2_XLR1.5@221.726,36.632 221.924,36.83 v1(223.266,36.83) ; v1(245.11,29.718) 246.888,27.94 246.888,17.064 249.572,14.38 249.824,14.38 250.484,13.719 J1_XLR1.2@250.484,13.468
  Bottom Layer w0.254: C4_XLR1.1@217.916,45.567 217.916,44.131 217.701,43.916 217.916,43.701 IC2_XLR1.1@217.916,42.056 217.916,40.552 219.197,39.271 220.611,39.271 221.726,38.156 IC2_XLR1.5@221.726,36.632 ; R65_XLR1.2@231.3,27.3 v1(231.3,28.3)
LIN2: C4_XLR3.1 IC2_XLR3.1 IC2_XLR3.5 J1_XLR3.2 R2.1 R6_XLR3.2 R65_XLR3.2 | length 95.5
  Top Layer w0.254: v1(222.758,100.584) 226.314,100.584 230.124,96.774 231.2,96.774 ; v1(231.3,92.4) 231.3,96.674 231.2,96.774 ; v1(246.634,92.71) 239.522,92.71 235.458,96.774 231.2,96.774
  Bottom Layer w0.254: C4_XLR3.1@217.916,109.567 217.916,108.131 217.701,107.916 217.916,107.701 IC2_XLR3.1@217.916,106.056 217.916,104.552 219.197,103.271 220.611,103.271 221.726,102.156 IC2_XLR3.5@221.726,100.632 222.71,100.632 v1(222.758,100.584) ; R65_XLR3.2@231.3,91.1 v1(231.3,92.4) ; v1(246.634,92.71) 248.158,91.186 248.158,87.201 250.19,85.169 250.19,82.042 249.936,81.788 249.936,77.516 J1_XLR3.2@250.484,76.968
  Bottom Layer w0.305: R2.1@205.314,84.438 207.628,84.438 209.804,86.614 209.804,104.394 213.326,107.916 R6_XLR3.2@217.701,107.916
LIN3: J3.2 R37.1 | length 91.2
  Bottom Layer w0.254: J3.2@146.95,146.727 147.2,146.477 147.2,137.3 159.444,125.056 181.136,125.056 190.61,115.582 196.718,109.474 204.603,109.474 207.383,106.694 207.383,100.423 206.235,99.275 cw(c206.055,99.455) 206.055,99.201 205.637,99.201 R37.1@205.314,99.17
Line_IN_XLR1: C14_XLR1.2 X1_XLR1.3 | length 43.8
  Top Layer w0.203: 232.902,43.998 234.37,45.466 239.743,45.466 240.557,46.28 242.145,46.28 244.252,48.387 245.481,48.387 247.65,50.556 247.65,53.375 246.248,54.777 246.213,54.777 246.037,54.953 246.037,55.755 X1_XLR1.3@245.729,56.063
  Top Layer w0.254: v1(216.954,47.613) 216.954,47.593 221.805,42.742 229.106,42.742 230.362,43.998 232.902,43.998
  Bottom Layer w0.254: v1(216.954,47.613) 218.104,47.613 C14_XLR1.2@218.344,47.853
Line_IN_XLR2: C14_XLR2.2 X1_XLR2.3 | length 44
  Top Layer w0.254: v1(217.001,79.723) 221.981,74.742 229.138,74.742 230.394,75.998 237.426,75.998 240.676,79.248 244.41,79.248 247.447,82.285 247.447,85.025 247.04,85.431 247.04,86.784 X1_XLR2.3@245.761,88.063
  Bottom Layer w0.254: v1(217.001,79.723) 218.246,79.723 C14_XLR2.2@218.376,79.853 ; X1_XLR2.3@245.761,88.063 X1_XLR2.3@246.233,88.063
Line_IN_XLR3: C14_XLR3.2 X1_XLR3.3 | length 44.9
  Top Layer w0.254: v1(216.987,111.723) 221.968,106.742 229.106,106.742 230.362,107.998 232.902,107.998 236.956,112.052 245.917,112.052 247.882,114.017 247.882,118.16 X1_XLR3.3@245.856,120.186
  Bottom Layer w0.254: v1(216.987,111.723) 218.214,111.723 C14_XLR3.2@218.344,111.853 ; X1_XLR3.3@245.729,120.063 X1_XLR3.3@246.201,120.063
Line_IN_XLR4: C14_XLR4.2 X1_XLR4.3 | length 48.2
  Top Layer w0.203: 239.887,146.602 241.035,146.602 242.67,148.237 246.248,148.237 246.983,147.502 246.983,146.971 v1(248.412,145.542)
  Top Layer w0.254: v1(216.824,143.723) 221.805,138.742 229.106,138.742 230.362,139.998 232.902,139.998 239.506,146.602 239.887,146.602
  Bottom Layer w0.254: v1(216.824,143.723) 218.214,143.723 C14_XLR4.2@218.344,143.853 ; X1_XLR4.3@245.729,152.063 247.65,150.142 247.65,146.304 v1(248.412,145.542)
LOUT1: J27.8 J29.2 U1.12 | length 119.9
  Top Layer w0.203: v1(159.258,30.352) 159.738,30.352 160.297,29.793 160.759,29.793 161.088,30.122 161.088,30.405 161.696,31.013 167.754,31.013 170.815,27.953 170.815,25.908 171.831,24.892 181.464,24.892 182.245,24.111 182.245,20.447 181.683,19.885 181.631,19.885 v1(181.583,19.837)
  Top Layer w0.254: v2(181.187,71.863) v2(193.277,71.863)
  Bottom Layer w0.203: v1(159.258,30.352) J27.8@159.258,32.385 ; J29.2@180.004,21.364 180.512,21.364 181.583,20.293 v1(181.583,19.837) ; v2(181.187,71.863) v2@181.212,71.838 ; v1@181.583,19.785 185.22,16.148 188.48,16.148 188.8,16.468 188.8,21.943 189.024,22.167 189.024,24.196 186.7,26.521 186.7,30.701 187.261,31.262 187.261,61.023 192.921,66.683 192.921,69.962 193.405,70.445 193.405,71.246 193.277,71.373 v2(193.277,71.863)
  Bottom Layer w0.254: U1.12@181.212,69.196 v2@181.212,71.838
LOUT2: J27.4 J30.2 U2.12 | length 115.7
  Top Layer w0.203: v1(161.812,30.338) 161.822,30.328 162.204,30.328 168.402,24.13 168.402,21.872 v1(167.894,21.364)
  Top Layer w0.254: v2(181.212,91.294) v2(192.769,91.294)
  Bottom Layer w0.203: J27.4@161.798,32.385 161.798,30.352 v1(161.812,30.338) ; J30.2@165.904,21.364 v1(167.894,21.364) 168.951,21.364 169.08,21.493 172.893,21.493 173.566,22.166 176.804,22.166 185.323,30.686 185.679,30.686 186.55,31.557 186.55,62.852 192.093,68.395 192.093,89.348 192.914,90.169 192.914,90.679 192.769,90.824 v2(192.769,91.294) ; v2(181.212,91.294) v2@181.237,91.269
  Bottom Layer w0.254: U2.12@181.237,88.627 v2@181.237,91.269
LOUT3: C82.1 J31.2 U3.12 | length 156.2
  Top Layer w0.203: v1(185.3,31.6) v1(208.6,31.6)
  Bottom Layer w0.203: J31.2@151.604,21.364 153.467,21.364 156.642,24.539 170.999,24.539 171.013,24.554 178.186,24.554 v1@185.278,31.646 ; U3.12@181.212,109.328 181.212,111.279 182.563,112.63 187.197,112.63 190.5,109.327 190.5,69.215 185.334,64.049 185.334,31.634 v1(185.3,31.6) ; C82.1@206.7,31.68 206.78,31.6 v1(208.6,31.6)
NetC1_XLR1_1: C1_XLR1.1 R2_XLR1.1 | length 2.2
  Bottom Layer w0.254: C1_XLR1.1@228.584,50.393 228.591,50.386 228.591,49.546 229.199,48.938 229.199,48.888 229.472,48.615 R2_XLR1.1@229.522,48.615
NetC1_XLR2_1: C1_XLR2.1 R2_XLR2.1 | length 2.2
  Bottom Layer w0.254: C1_XLR2.1@228.616,82.393 228.623,82.386 228.623,81.546 229.231,80.938 229.231,80.888 229.504,80.615 R2_XLR2.1@229.554,80.615
NetC1_XLR3_1: C1_XLR3.1 R2_XLR3.1 | length 2.2
  Bottom Layer w0.254: C1_XLR3.1@228.584,114.393 228.591,114.386 228.591,113.546 229.199,112.938 229.199,112.888 229.472,112.615 R2_XLR3.1@229.522,112.615
NetC1_XLR4_1: C1_XLR4.1 R2_XLR4.1 | length 2.2
  Bottom Layer w0.254: C1_XLR4.1@228.584,146.393 228.591,146.386 228.591,145.546 229.199,144.938 229.199,144.888 229.472,144.615 R2_XLR4.1@229.522,144.615
NetC3_XLR1_1: C3_XLR1.1 IC1_XLR1.7 R3_XLR1.1 R5_XLR1.2 | length 17.8
  Bottom Layer w0.254: R3_XLR1.1@220.964,45.743 220.964,45.693 221.834,44.823 222.771,44.823 223.486,44.108 223.486,43.252 223.867,42.871 224.141,42.871 224.627,42.385 224.627,40.789 226.552,38.864 226.552,35.634 226.904,35.282 226.904,33.931 226.094,33.121 226.044,33.121 226.044,31.851 C3_XLR1.1@226.298,31.597
NetC3_XLR1_2: C3_XLR1.2 IC1_XLR1.6 R5_XLR1.1 R9_XLR1.2 | length 6.7
  Bottom Layer w0.254: C3_XLR1.2@227.648,31.597 227.822,31.771 R5_XLR1.1@227.822,33.121 ; R5_XLR1.1@227.744,33.121 R5_XLR1.1@227.822,33.121 ; IC1_XLR1.6@227.822,36.632 R5_XLR1.1@227.822,33.121 ; R9_XLR1.2@229.346,33.121 R5_XLR1.1@227.822,33.121
NetC3_XLR2_1: C3_XLR2.1 IC1_XLR2.7 R3_XLR2.1 R5_XLR2.2 | length 17.8
  Bottom Layer w0.254: R3_XLR2.1@220.996,77.743 220.996,77.693 221.866,76.823 222.803,76.823 223.507,76.119 223.507,75.263 223.899,74.871 224.173,74.871 224.659,74.385 224.659,72.789 226.584,70.864 226.584,67.634 226.936,67.282 226.936,65.931 226.126,65.121 226.076,65.121 226.076,63.851 C3_XLR2.1@226.33,63.597
NetC3_XLR2_2: C3_XLR2.2 IC1_XLR2.6 R5_XLR2.1 R9_XLR2.2 | length 6.7
  Bottom Layer w0.254: C3_XLR2.2@227.68,63.597 227.854,63.771 R5_XLR2.1@227.854,65.121 ; R5_XLR2.1@227.776,65.121 R5_XLR2.1@227.854,65.121 ; IC1_XLR2.6@227.854,68.632 R5_XLR2.1@227.854,65.121 ; R9_XLR2.2@229.378,65.121 R5_XLR2.1@227.854,65.121
NetC3_XLR3_1: C3_XLR3.1 IC1_XLR3.7 R3_XLR3.1 R5_XLR3.2 | length 17.8
  Bottom Layer w0.254: R3_XLR3.1@220.964,109.743 220.964,109.693 221.834,108.823 222.771,108.823 223.486,108.108 223.486,107.252 223.867,106.871 224.141,106.871 224.627,106.385 224.627,104.789 226.552,102.864 226.552,99.634 226.904,99.282 226.904,97.931 226.094,97.121 226.044,97.121 226.044,95.851 C3_XLR3.1@226.298,95.597
NetC3_XLR3_2: C3_XLR3.2 IC1_XLR3.6 R5_XLR3.1 R9_XLR3.2 | length 6.7
  Bottom Layer w0.254: C3_XLR3.2@227.648,95.597 227.822,95.771 R5_XLR3.1@227.822,97.121 ; R5_XLR3.1@227.744,97.121 R5_XLR3.1@227.822,97.121 ; IC1_XLR3.6@227.822,100.632 R5_XLR3.1@227.822,97.121 ; R9_XLR3.2@229.346,97.121 R5_XLR3.1@227.822,97.121
NetC3_XLR4_1: C3_XLR4.1 IC1_XLR4.7 R3_XLR4.1 R5_XLR4.2 | length 17.8
  Bottom Layer w0.254: R3_XLR4.1@220.964,141.743 220.964,141.693 221.834,140.823 222.771,140.823 223.486,140.108 223.486,139.252 223.867,138.871 224.141,138.871 224.627,138.385 224.627,136.789 226.552,134.864 226.552,131.634 226.904,131.282 226.904,129.931 226.094,129.121 226.044,129.121 226.044,127.851 C3_XLR4.1@226.298,127.597
NetC3_XLR4_2: C3_XLR4.2 IC1_XLR4.6 R5_XLR4.1 R9_XLR4.2 | length 6.7
  Bottom Layer w0.254: C3_XLR4.2@227.648,127.597 227.822,127.771 R5_XLR4.1@227.822,129.121 ; R5_XLR4.1@227.744,129.121 R5_XLR4.1@227.822,129.121 ; IC1_XLR4.6@227.822,132.632 R5_XLR4.1@227.822,129.121 ; R9_XLR4.2@229.346,129.121 R5_XLR4.1@227.822,129.121
NetC4_XLR1_2: C4_XLR1.2 IC2_XLR1.2 R6_XLR1.1 R10_XLR1.2 | length 11.4
  Top Layer w0.254: v1(219.186,40.442) 219.821,39.807 v1(219.821,35.405)
  Bottom Layer w0.254: v1(219.186,40.442) IC2_XLR1.2@219.186,42.056 219.266,42.136 C4_XLR1.2@219.266,45.567 ; R10_XLR1.2@219.694,34.518 219.818,34.642 219.818,35.402 v1(219.821,35.405)
NetC4_XLR2_2: C4_XLR2.2 IC2_XLR2.2 R6_XLR2.1 R10_XLR2.2 | length 11.4
  Top Layer w0.254: v1(219.218,72.442) 219.853,71.807 v1(219.853,67.405)
  Bottom Layer w0.254: v1(219.218,72.442) IC2_XLR2.2@219.218,74.056 219.298,74.136 C4_XLR2.2@219.298,77.567 ; R10_XLR2.2@219.726,66.518 219.85,66.642 219.85,67.402 v1(219.853,67.405)
NetC4_XLR3_2: C4_XLR3.2 IC2_XLR3.2 R6_XLR3.1 R10_XLR3.2 | length 12.6
  Top Layer w0.254: v1(220.123,104.378) 220.123,104.282 219.894,104.054 219.894,103.801 219.894,99.636 220.152,99.378 220.227,99.378 220.372,99.233 v1(220.468,99.233)
  Bottom Layer w0.254: C4_XLR3.2@219.266,109.567 219.266,107.916 219.266,106.136 IC2_XLR3.2@219.186,106.056 219.186,104.785 219.592,104.378 v1(220.123,104.378) ; R10_XLR3.2@219.694,98.518 219.744,98.518 220.017,98.791 220.017,98.925 220.257,99.165 220.4,99.165 v1(220.468,99.233)
NetC4_XLR4_2: C4_XLR4.2 IC2_XLR4.2 R6_XLR4.1 R10_XLR4.2 | length 11.4
  Top Layer w0.254: v1(219.186,136.442) 219.821,135.807 v1(219.821,131.405)
  Bottom Layer w0.254: v1(219.186,136.442) IC2_XLR4.2@219.186,138.056 219.266,138.136 C4_XLR4.2@219.266,141.567 ; R10_XLR4.2@219.694,130.518 219.818,130.642 219.818,131.402 v1(219.821,131.405)
NetC5_XLR1_2: C5_XLR1.2 IC1_XLR1.3 R2_XLR1.2 R11_XLR1.2 | length 7.2
  Bottom Layer w0.254: IC1_XLR1.3@227.822,42.056 227.799,42.079 227.799,43.051 227.39,43.46 227.39,44.881 227.499,44.99 227.499,45.04 227.772,45.313 227.822,45.313 227.822,46.583 C5_XLR1.2@228.076,46.837 227.822,47.091 R2_XLR1.2@227.822,48.615
NetC5_XLR2_2: C5_XLR2.2 IC1_XLR2.3 R2_XLR2.2 R11_XLR2.2 | length 7.2
  Bottom Layer w0.254: IC1_XLR2.3@227.854,74.056 227.831,74.079 227.831,75.051 227.422,75.46 227.422,76.881 227.531,76.99 227.531,77.04 227.804,77.313 227.854,77.313 227.854,78.583 C5_XLR2.2@228.108,78.837 227.854,79.091 R2_XLR2.2@227.854,80.615
NetC5_XLR3_2: C5_XLR3.2 IC1_XLR3.3 R2_XLR3.2 R11_XLR3.2 | length 7.2
  Bottom Layer w0.254: IC1_XLR3.3@227.822,106.056 227.799,106.079 227.799,107.051 227.39,107.46 227.39,108.881 227.499,108.99 227.499,109.04 227.772,109.313 227.822,109.313 227.822,110.583 C5_XLR3.2@228.076,110.837 227.822,111.091 R2_XLR3.2@227.822,112.615
NetC5_XLR4_2: C5_XLR4.2 IC1_XLR4.3 R2_XLR4.2 R11_XLR4.2 | length 7.2
  Bottom Layer w0.254: IC1_XLR4.3@227.822,138.056 227.799,138.079 227.799,139.051 227.39,139.46 227.39,140.881 227.499,140.99 227.499,141.04 227.772,141.313 227.822,141.313 227.822,142.583 C5_XLR4.2@228.076,142.837 227.822,143.091 R2_XLR4.2@227.822,144.615
NetC6_XLR1_1: C6_XLR1.1 IC1_XLR1.1 R1_XLR1.1 R8_XLR1.1 | length 5.3
  Bottom Layer w0.254: C6_XLR1.1@224.44,46.837 224.266,46.663 224.266,43.789 224.502,43.553 224.502,43.157 224.967,42.692 225.084,42.692 225.282,42.494 IC1_XLR1.1@225.282,42.056